# Altium PCB NumatoShieldAutoRouted.PcbDoc (part 1 of 2)
Units mm, origin at the board's own origin, x right, y up, seen from the top; angles counter-clockwise.
Board outline 127 x 127 mm, 4 copper layers (Top Layer, Mid-Layer 1, Mid-Layer 2, Bottom Layer); 8 components, 163 nets, 352 pads, 0 vias.
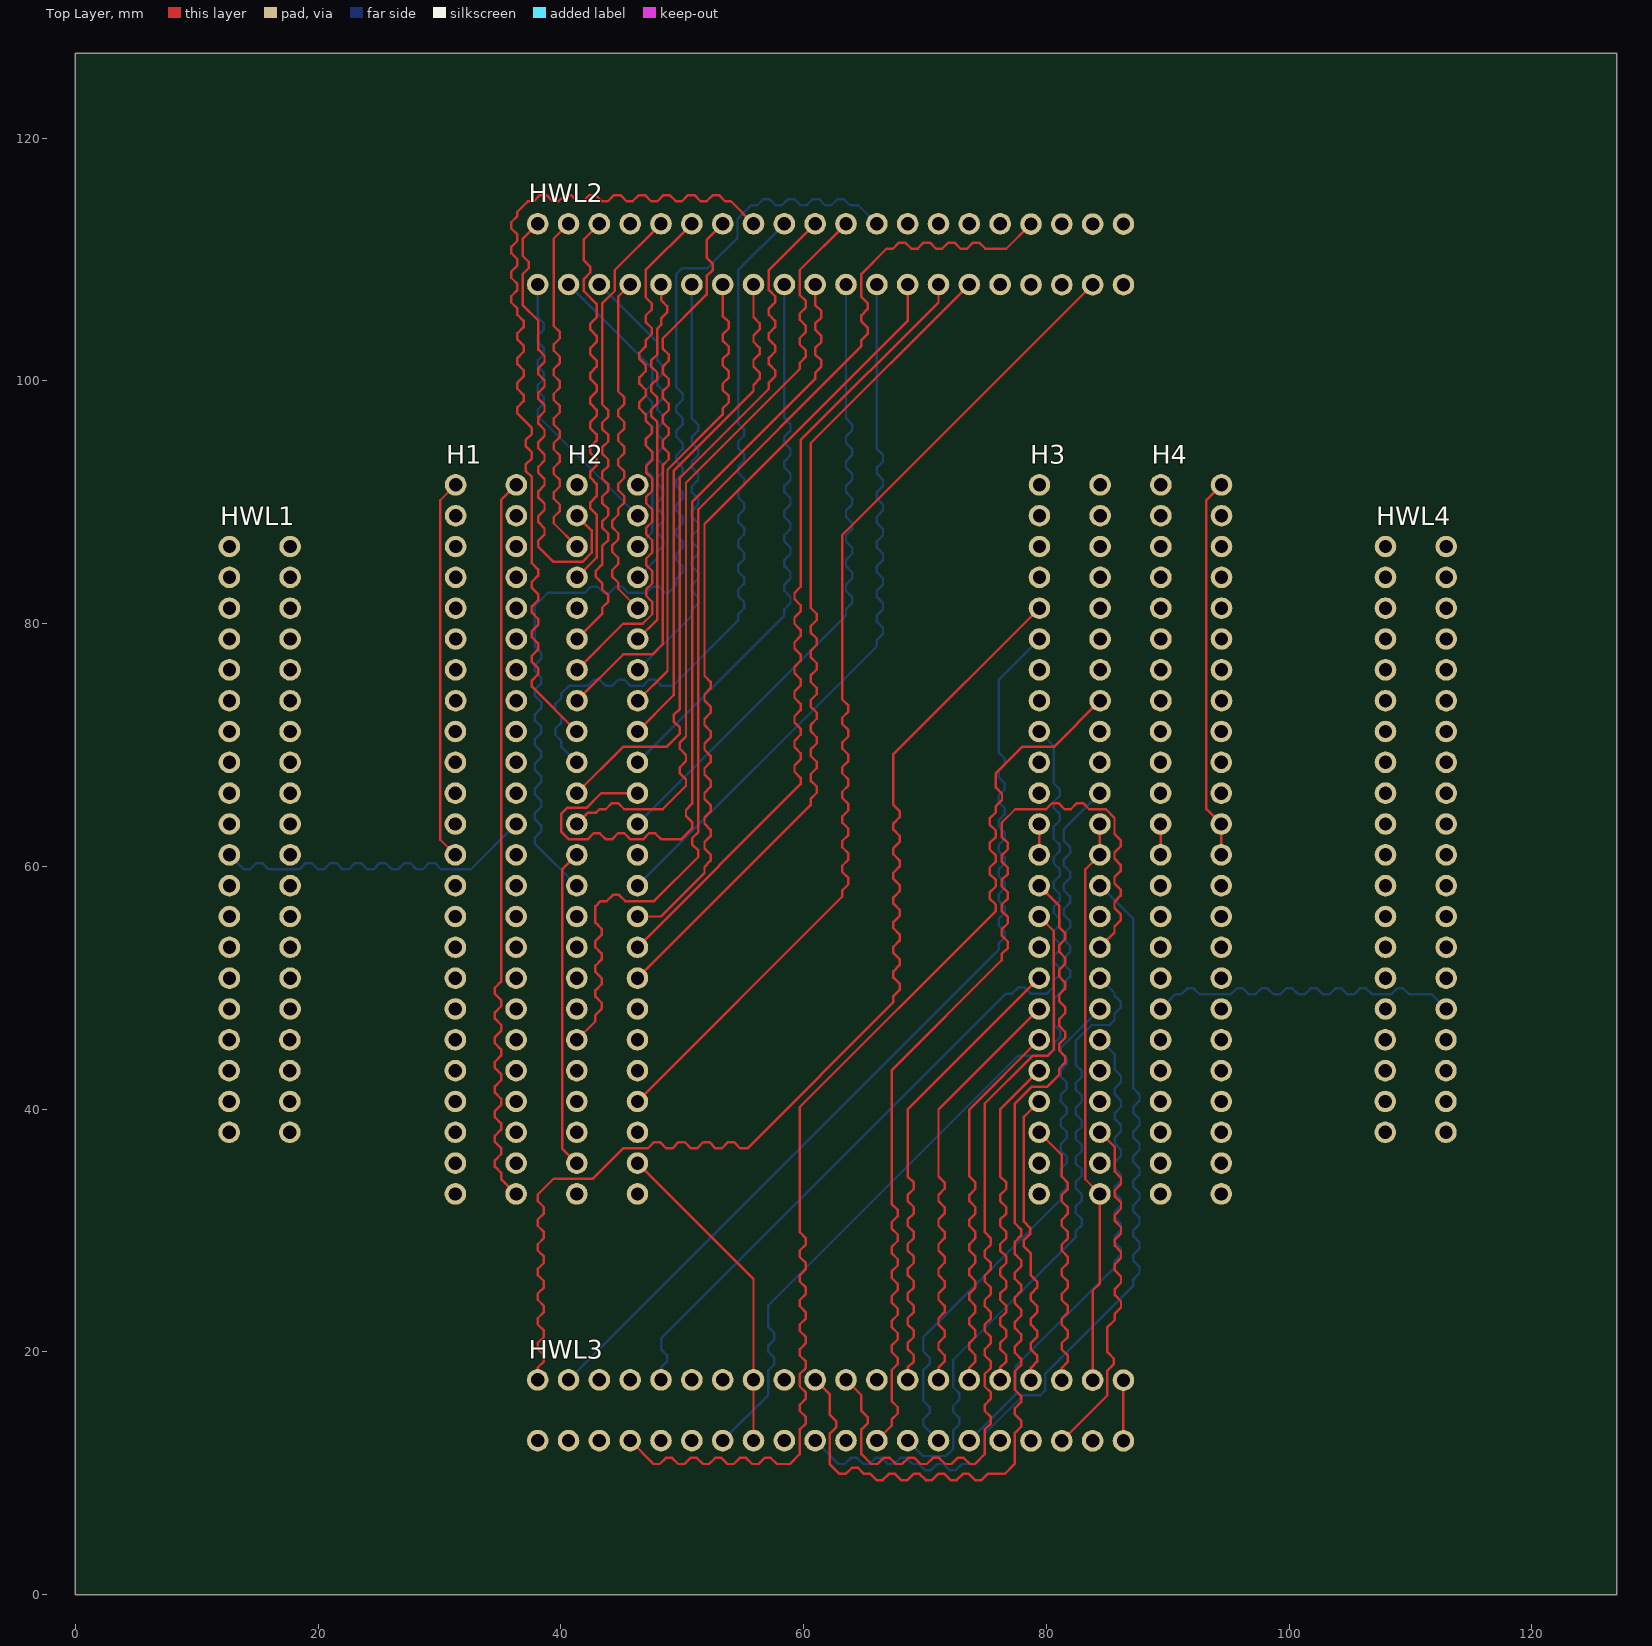
[diagram p0: Top Layer view]
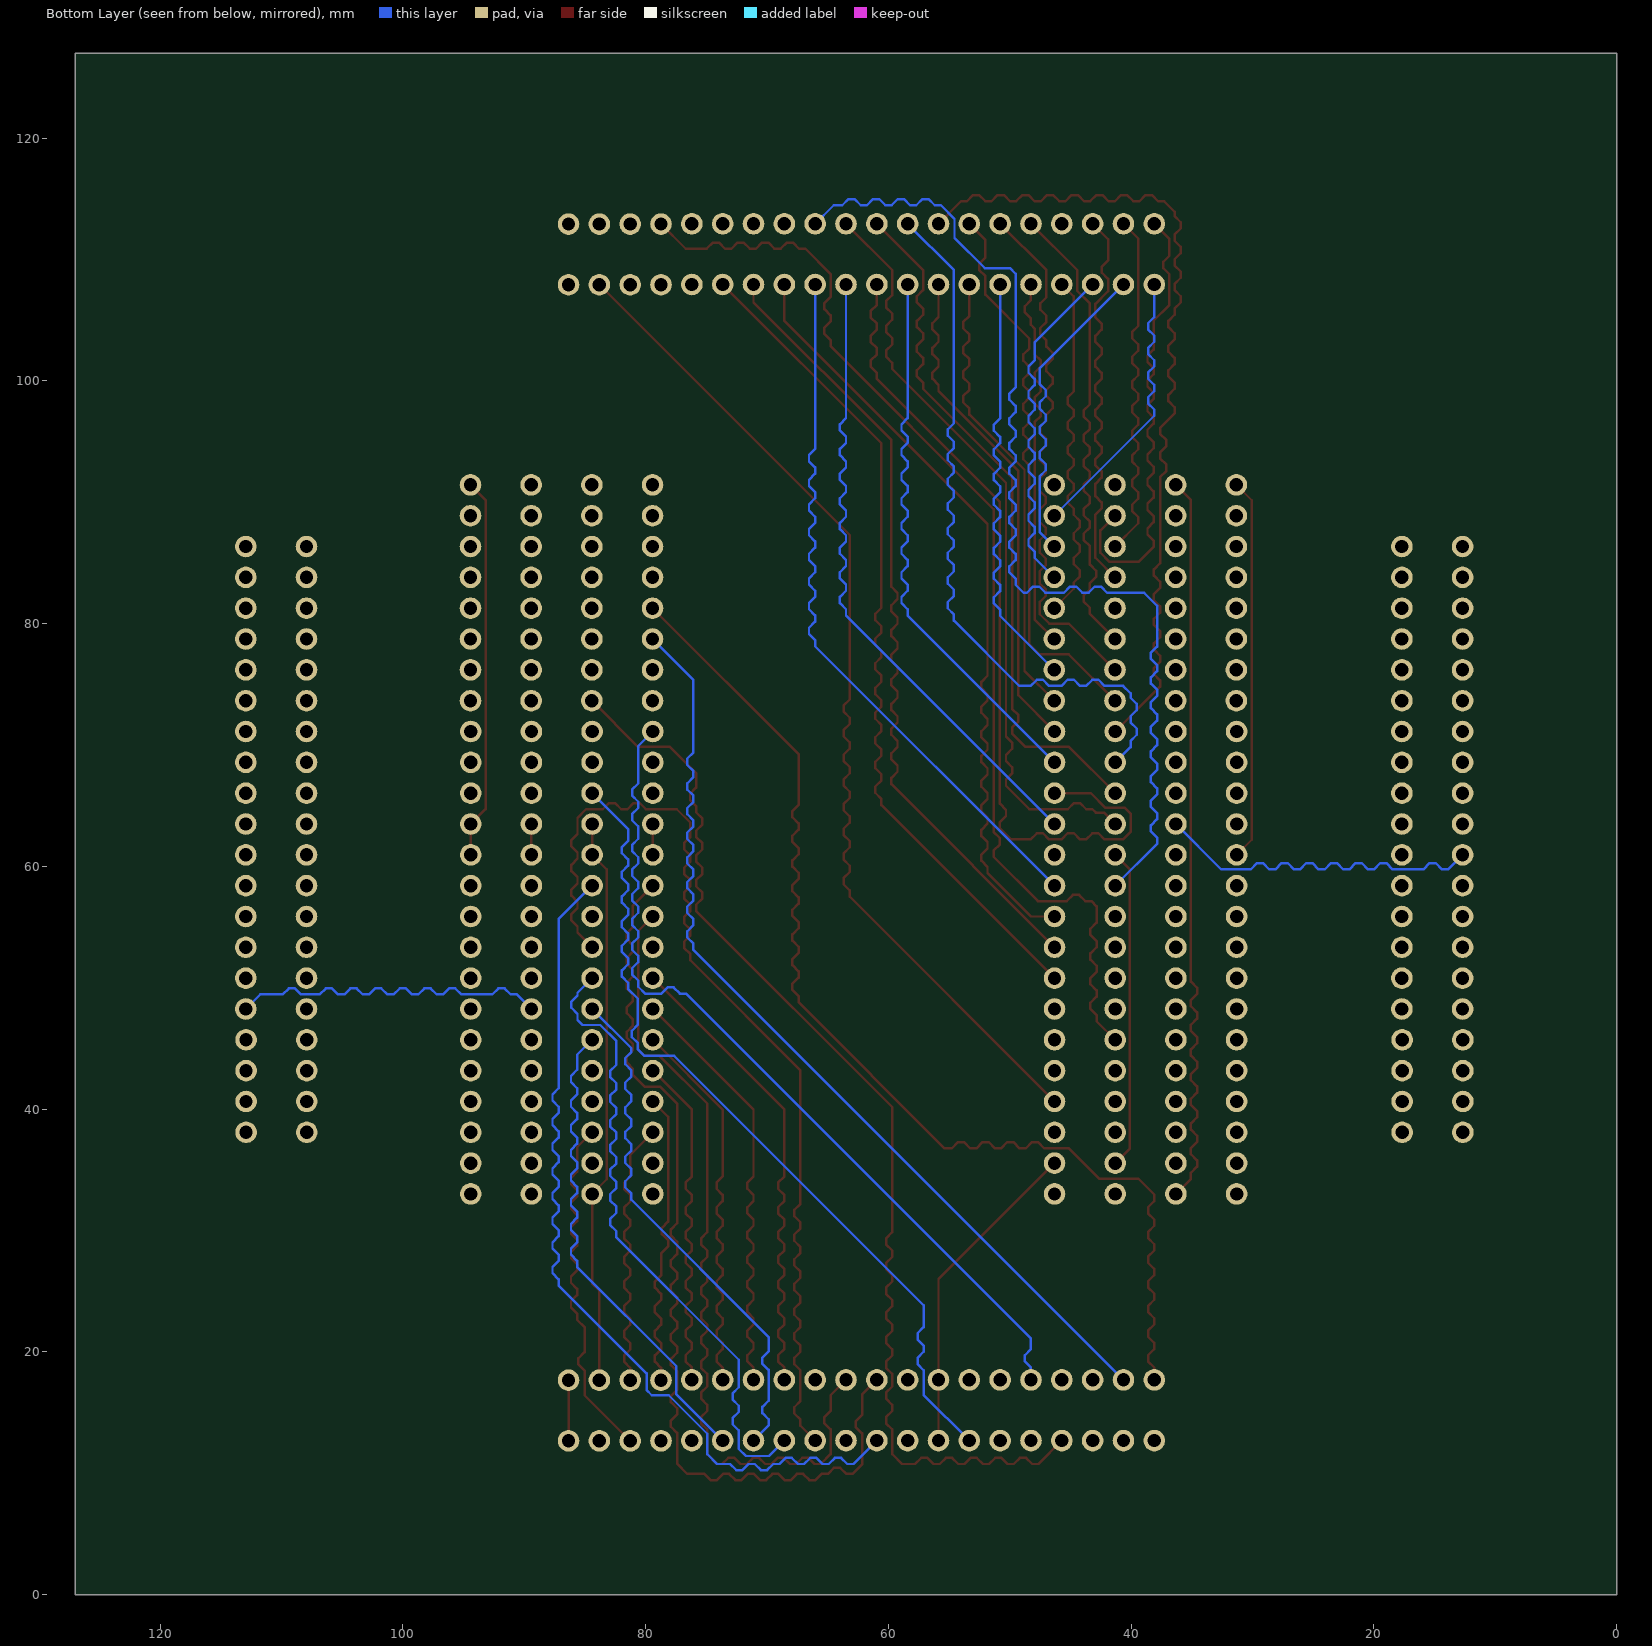
[diagram p1: Bottom Layer view, seen from below]
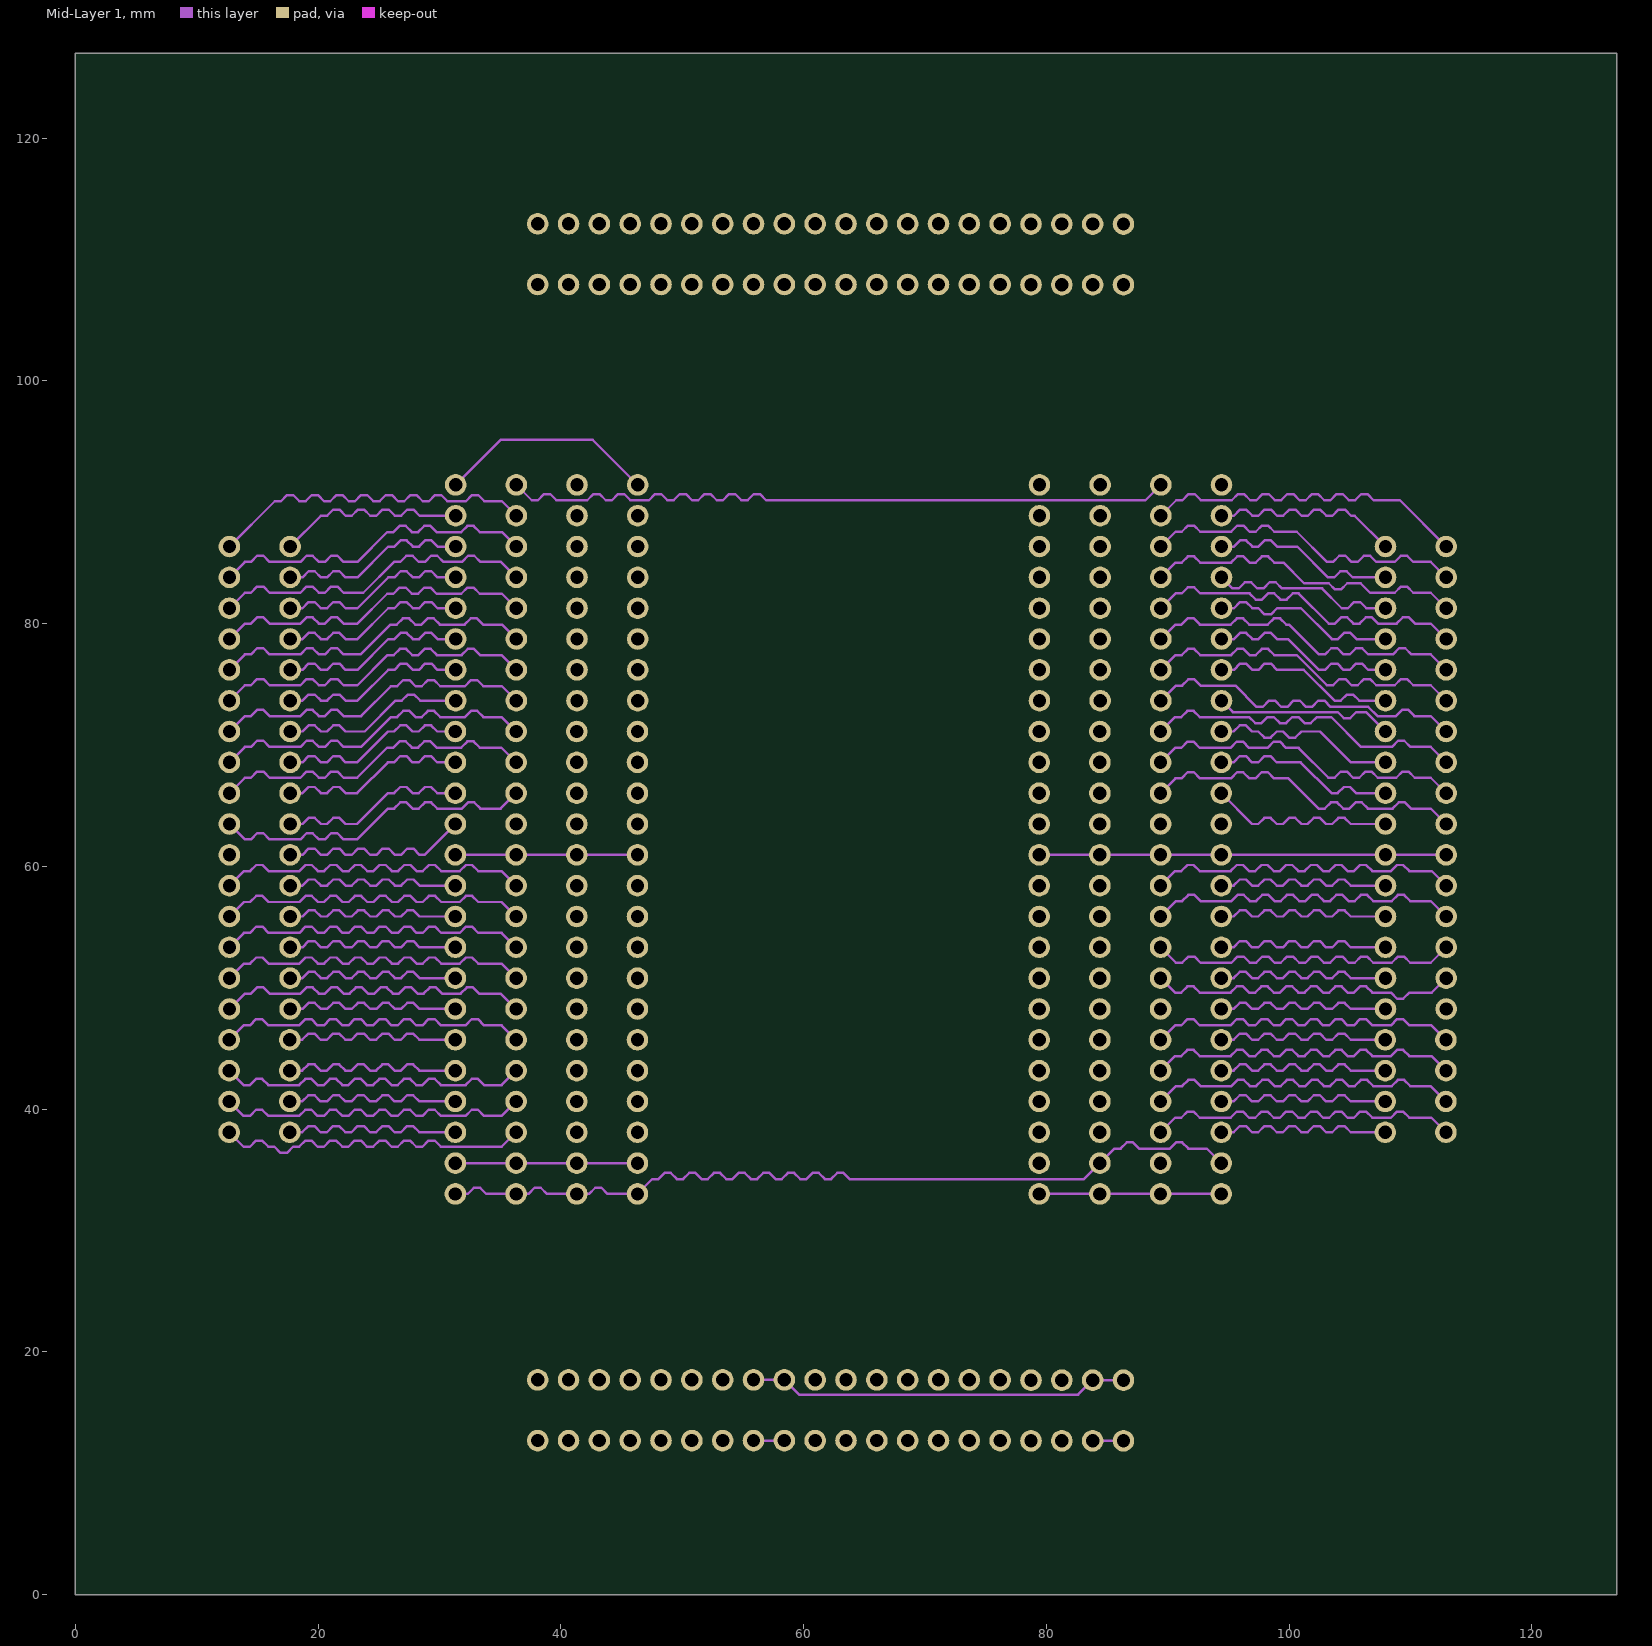
[diagram p2: Mid-Layer 1]
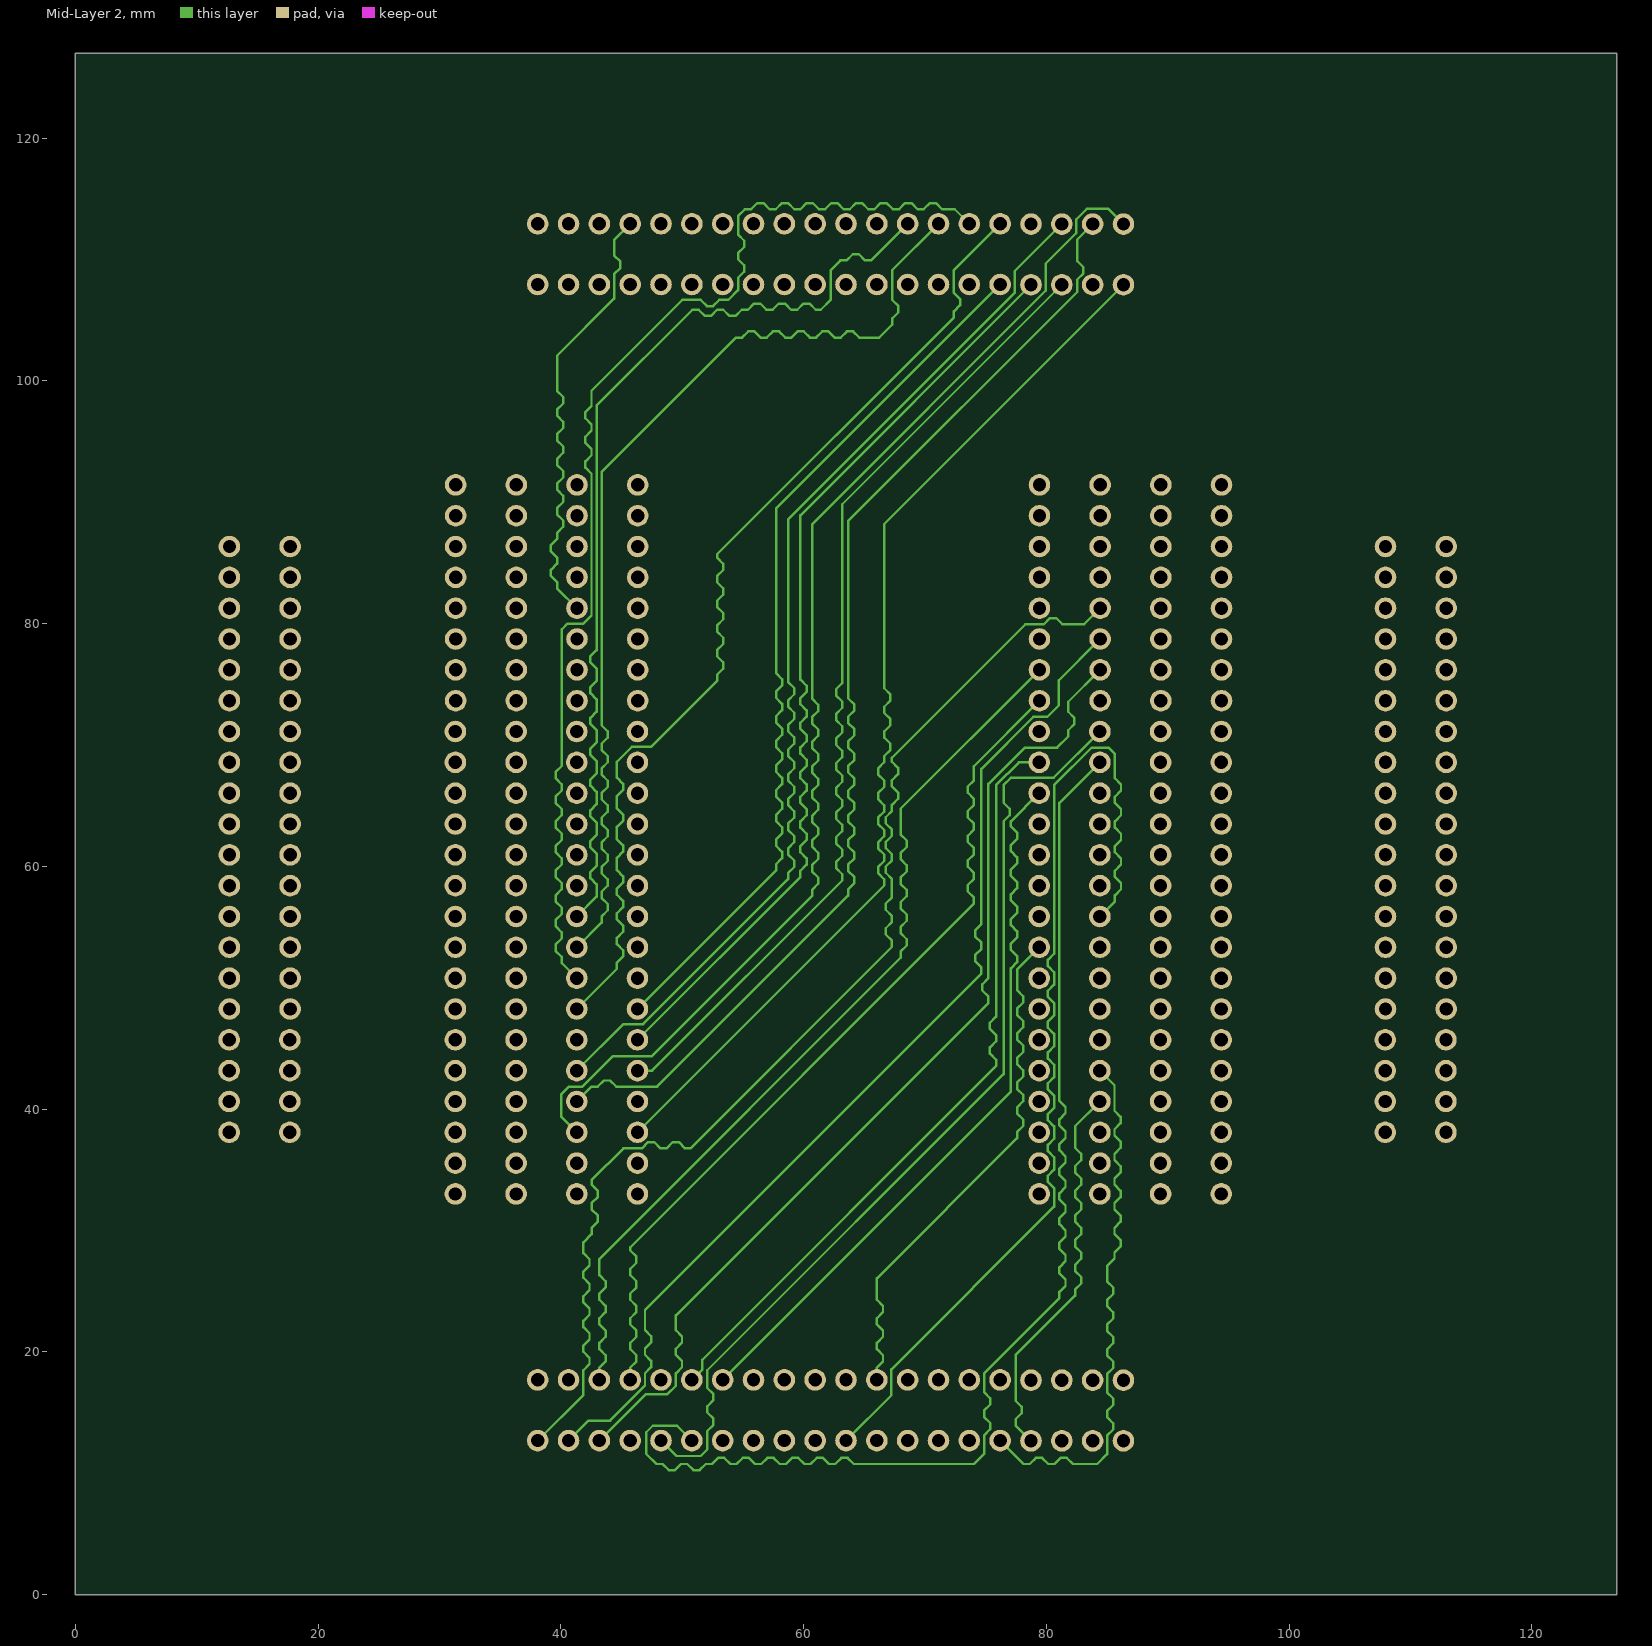
[diagram p3: Mid-Layer 2]

## Layer stack, top to bottom
Top Solder: solder mask 0.0102, Solder Resist, Dk 3.5
Top Layer: signal copper 0.0356
Dielectric 1: dielectric 0.32, FR-4, Dk 4.8
Mid-Layer 1: signal copper 0.0356
Dielectric2: dielectric 0.32, FR-4, Dk 4.8
Mid-Layer 2: signal copper 0.0356
Dielectric3: dielectric 0.32, FR-4, Dk 4.8
Bottom Layer: signal copper 0.0356
Bottom Solder: solder mask 0.0102, Solder Resist, Dk 3.5

## Board outline
0,0 127,0 127,127 0,127

## Design rules (kind name [scope] priority, off if disabled: settings)
Clearance [All] p1: gap=0.203
MatchedLengths [All] p1: tolerance=25.4 checknetsindiffpair=TRUE checkdiffpairvsdiffpair=TRUE checkothers=TRUE
PolygonConnect [All] p1: connectstyle=Relief reliefconductorwidth=0.254 reliefentries=4 polygonreliefangle="90 Angle" airgapwidth=0.254
RoutingVias [All] p1: holewidth=0.635 width=1.016 viastyle="Through Hole" minholewidth=0.711 minwidth=1.27 maxholewidth=0.711 maxwidth=1.27
SolderMaskExpansion [All] p1: expansion=0.102
Width [All] p1: maxlimit=0.203 minlimit=0.203 preferedwidth=0.203
29 further rules are at their usual default settings.

## Components (designator, comment, footprint, x,y, rotation, side; value= is the part's Value field where it differs from the comment)
H1 "HEADER2X48" H_FP 36.317,33.02 r90 top
H2 "HEADER2X48" H_FP 46.317,33.02 r90 top
H3 "HEADER2X48" H_FP 84.417,33.02 r90 top
H4 "HEADER2X48" H_FP 94.417,33.02 r90 top
HWL1 "71918-240LF" HWL_FP 12.7,86.36 r270 top
HWL2 "71918-240LF" HWL_FP 38.1,107.95 r0 top
HWL3 "71918-240LF" HWL_FP 38.1,12.7 r0 top
HWL4 "71918-240LF" HWL_FP 107.95,86.36 r270 top

## Footprints (in the part's own frame and the unit in brackets; to place one, negate y for a bottom-side part, rotate by r counter-clockwise, add the part's x,y. Pads: shape width x height; smd on the part's side, far side on the other; paste and mask are expansions set on the pad)
H_FP [mil]
  round 70 hole 43.31: 1(0,0) 2(0,196.85) 3(100,0) 4(100,196.85) 5(200,0) 6(200,196.85) 7(300,0) 8(300,196.85) 9(400,0) 10(400,196.85) 11(500,0) 12(500,196.85) 13(600,0) 14(600,196.85) 15(700,0) 16(700,196.85) 17(800,0) 18(800,196.85) 19(900,0) 20(900,196.85) 21(1000,0) 22(1000,196.85) 23(1100,0) 24(1100,196.85) 25(1200,0) 26(1200,196.85) 27(1300,0) 28(1300,196.85) 29(1400,0) 30(1400,196.85) 31(1500,0) 32(1500,196.85) 33(1600,-0.84) 34(1600,196.01) 35(1700,-0.84) 36(1700,196.01) 37(1800,-0.84) 38(1800,196.01) 39(1900,-0.84) 40(1900,196.01) 41(2000,-0.84) 42(2000,196.01) 43(2100,-0.84) 44(2100,196.01) 45(2200,-0.84) 46(2200,196.01) 47(2300,-0.84) 48(2300,196.01)
HWL_FP [mil]
  round 70 hole 43.31: 0(0,0) 1(100,0) 2(200,0) 3(300,0) 4(400,0) 5(500,0) 6(600,0) 7(700,0) 8(800,0) 9(900,0) 10(1000,0) 11(1100,0) 12(1200,0) 13(1300,0) 14(1400,0) 15(1500,0) 16(1600,-0.83) 17(1700,-0.83) 18(1800,-0.83) 19(1900,-0.83) 20(1900,196.02) 21(1800,196.02) 22(1700,196.02) 23(1600,196.02) 24(1500,196.85) 25(1400,196.85) 26(1300,196.85) 27(1200,196.85) 28(1100,196.85) 29(1000,196.85) 30(900,196.85) 31(800,196.85) 32(700,196.85) 33(600,196.85) 34(500,196.85) 35(400,196.85) 36(300,196.85) 37(200,196.85) 38(100,196.85) 39(0,196.85)

## Part data
HWL1 HWL2 HWL3 HWL4: "CONN HEADER 40POS DUAL VERT PCB"

## Nets (pads, with @x,y where several pads share a name; then routed paths per layer and width w, separated by ;. In a path a pad name is that pad's centre, name@x,y a point inside that pad or via, vN(x,y) a via of type N, cw(c..) or ccw(c..) an arc to the next point about the centre after c; other vN are vias at no path point)
3V3: H1.1 H1.2 H1.47 H2.1 H2.2 H3.3 H4.3 H4.48 | length 191
  Top Layer w0.203: H1.1@36.317,33.02 35.077,34.26 35.077,34.768 34.569,35.276 34.569,35.784 35.077,36.292 35.077,36.8 34.569,37.308 34.569,37.816 35.077,38.324 35.077,38.832 34.569,39.34 34.569,39.848 35.077,40.356 35.077,40.864 34.569,41.372 34.569,41.88 35.077,42.388 35.077,42.896 34.569,43.404 34.569,43.912 35.077,44.42 35.077,44.928 34.569,45.436 34.569,45.944 35.077,46.452 35.077,46.96 34.569,47.468 34.569,47.976 35.077,48.484 35.077,48.992 34.569,49.5 34.569,50.008 35.077,50.516 35.077,90.179 H1.47@36.339,91.44
  Mid-Layer 1 w0.203: H1.2@31.317,33.02 32.333,33.02 32.841,33.528 33.349,33.528 33.857,33.02 H1.1@36.317,33.02 37.333,33.02 37.841,33.528 38.349,33.528 38.857,33.02 H2.2@41.317,33.02 42.333,33.02 42.841,33.528 43.349,33.528 43.857,33.02 H2.1@46.317,33.02 47.537,34.239 48.045,34.239 48.553,34.747 49.061,34.747 49.569,34.239 50.077,34.239 50.585,34.747 51.093,34.747 51.601,34.239 52.109,34.239 52.617,34.747 53.125,34.747 53.633,34.239 54.141,34.239 54.649,34.747 55.157,34.747 55.665,34.239 56.173,34.239 56.681,34.747 57.189,34.747 57.697,34.239 58.205,34.239 58.713,34.747 59.221,34.747 59.729,34.239 60.237,34.239 60.745,34.747 61.253,34.747 61.761,34.239 62.269,34.239 62.777,34.747 63.285,34.747 63.793,34.239 83.097,34.239 H3.3@84.417,35.56 85.611,36.754 86.119,36.754 86.627,37.262 87.135,37.262 87.643,36.754 90.183,36.754 90.691,37.262 91.199,37.262 91.707,36.754 93.224,36.754 H4.3@94.417,35.56 ; H1.47@36.339,91.44 37.609,90.17 38.117,90.17 38.625,90.678 39.133,90.678 39.641,90.17 42.181,90.17 42.689,90.678 43.197,90.678 43.705,90.17 44.213,90.17 44.721,90.678 45.229,90.678 45.737,90.17 47.261,90.17 47.769,90.678 48.277,90.678 48.785,90.17 49.293,90.17 49.801,90.678 50.309,90.678 50.817,90.17 51.325,90.17 51.833,90.678 52.341,90.678 52.849,90.17 53.357,90.17 53.865,90.678 54.373,90.678 54.881,90.17 55.389,90.17 55.897,90.678 56.405,90.678 56.913,90.17 88.169,90.17 H4.48@89.439,91.44
A2: H2.6 HWL2.20 | length 104
  Mid-Layer 2 w0.203: H2.6@41.317,38.1 40.056,39.362 40.056,41.25 40.64,41.834 41.758,41.834 44.298,44.374 47.511,44.374 60.706,57.569 60.706,58.077 61.214,58.585 61.214,59.093 60.706,59.601 60.706,60.109 61.214,60.617 61.214,61.125 60.706,61.633 60.706,62.141 61.214,62.649 61.214,63.157 60.706,63.665 60.706,64.173 61.214,64.681 61.214,65.189 60.706,65.697 60.706,66.205 61.214,66.713 61.214,67.221 60.706,67.729 60.706,68.237 61.214,68.745 61.214,69.253 60.706,69.761 60.706,70.269 61.214,70.777 61.214,71.285 60.706,71.793 60.706,72.301 61.214,72.809 61.214,73.317 60.706,73.825 60.706,88.189 79.959,107.442 79.959,109.677 82.474,112.192 82.474,113.309 83.337,114.173 85.116,114.173 HWL2.20@86.36,112.929
A3: H1.6 HWL1.20 | length 15.7
  Mid-Layer 1 w0.203: HWL1.20@17.679,38.1 18.695,38.1 19.203,38.608 19.711,38.608 20.219,38.1 20.727,38.1 21.235,38.608 21.743,38.608 22.251,38.1 22.759,38.1 23.267,38.608 23.775,38.608 24.283,38.1 24.791,38.1 25.299,38.608 25.807,38.608 26.315,38.1 26.823,38.1 27.331,38.608 27.839,38.608 28.347,38.1 H1.6@31.317,38.1
A4: H2.8 HWL2.21 | length 97.3
  Mid-Layer 2 w0.203: H2.8@41.317,40.64 42.537,41.859 43.045,41.859 43.553,42.367 44.061,42.367 44.569,41.859 47.93,41.859 63.678,57.607 63.678,58.115 64.186,58.623 64.186,59.131 63.678,59.639 63.678,60.147 64.186,60.655 64.186,61.163 63.678,61.671 63.678,62.179 64.186,62.687 64.186,63.195 63.678,63.703 63.678,64.211 64.186,64.719 64.186,65.227 63.678,65.735 63.678,66.243 64.186,66.751 64.186,67.259 63.678,67.767 63.678,68.275 64.186,68.783 64.186,69.291 63.678,69.799 63.678,70.307 64.186,70.815 64.186,71.323 63.678,71.831 63.678,72.339 64.186,72.847 64.186,73.355 63.678,73.863 63.678,88.468 82.55,107.34 82.55,108.356 83.058,108.864 83.058,109.372 82.55,109.88 82.55,111.659 HWL2.21@83.82,112.929
A5: H1.8 HWL1.21 | length 15.7
  Mid-Layer 1 w0.203: HWL1.21@17.679,40.64 18.695,40.64 19.203,41.148 19.711,41.148 20.219,40.64 20.727,40.64 21.235,41.148 21.743,41.148 22.251,40.64 22.759,40.64 23.267,41.148 23.775,41.148 24.283,40.64 24.791,40.64 25.299,41.148 25.807,41.148 26.315,40.64 26.823,40.64 27.331,41.148 27.839,41.148 28.347,40.64 H1.8@31.317,40.64
A6: H1.10 HWL1.22 | length 15.7
  Mid-Layer 1 w0.203: HWL1.22@17.679,43.18 18.695,43.18 19.203,43.688 19.711,43.688 20.219,43.18 20.727,43.18 21.235,43.688 21.743,43.688 22.251,43.18 22.759,43.18 23.267,43.688 23.775,43.688 24.283,43.18 24.791,43.18 25.299,43.688 25.807,43.688 26.315,43.18 26.823,43.18 27.331,43.688 27.839,43.688 28.347,43.18 H1.10@31.317,43.18
A7: H2.12 HWL2.23 | length 96.1
  Top Layer w0.203: H2.12@41.317,45.72 42.85,47.252 42.85,47.76 43.358,48.268 43.358,48.776 42.85,49.284 42.85,49.792 43.358,50.3 43.358,50.808 42.85,51.316 42.85,51.824 43.358,52.332 43.358,52.84 42.85,53.348 42.85,53.856 43.358,54.364 43.358,54.872 42.85,55.38 42.85,56.718 43.282,57.15 43.79,57.15 44.298,57.658 44.806,57.658 45.314,57.15 47.684,57.15 51.333,60.8 51.333,61.308 50.825,61.816 50.825,62.324 51.333,62.832 51.333,89.433 64.77,102.87 64.77,103.378 65.278,103.886 65.278,104.394 64.77,104.902 64.77,105.41 65.278,105.918 65.278,106.426 64.77,106.934 64.77,108.814 66.853,110.896 67.361,110.896 67.869,111.404 68.377,111.404 68.885,110.896 69.393,110.896 69.901,111.404 70.409,111.404 70.917,110.896 71.425,110.896 71.933,111.404 72.441,111.404 72.949,110.896 73.457,110.896 73.965,111.404 74.473,111.404 74.981,110.896 76.708,110.896 HWL2.23@78.74,112.929
A8: H2.14 HWL2.24 | length 85.5
  Mid-Layer 2 w0.203: H2.14@41.317,48.26 44.628,51.57 44.628,52.078 45.136,52.586 45.136,53.094 44.628,53.602 44.628,54.11 45.136,54.618 45.136,55.126 44.628,55.634 44.628,56.142 45.136,56.65 45.136,57.158 44.628,57.666 44.628,58.174 45.136,58.682 45.136,59.19 44.628,59.698 44.628,60.714 45.136,61.222 45.136,61.73 44.628,62.238 44.628,63.254 45.136,63.762 45.136,64.27 44.628,64.778 44.628,65.794 45.136,66.302 45.136,66.81 44.628,67.318 44.628,68.631 45.847,69.85 47.447,69.85 52.883,75.286 52.883,75.794 53.391,76.302 53.391,76.81 52.883,77.318 52.883,77.826 53.391,78.334 53.391,78.842 52.883,79.35 52.883,79.858 53.391,80.366 53.391,80.874 52.883,81.382 52.883,81.89 53.391,82.398 53.391,82.906 52.883,83.414 52.883,83.922 53.391,84.43 53.391,84.938 52.883,85.446 52.883,85.725 72.39,105.232 72.39,105.74 72.898,106.248 72.898,106.756 72.39,107.264 72.39,109.14 HWL2.24@76.2,112.95
A9: H2.18 HWL2.26 | length 84.8
  Mid-Layer 2 w0.203: H2.18@41.317,53.34 43.358,55.38 43.358,55.888 43.866,56.396 43.866,56.904 43.358,57.412 43.358,57.92 43.866,58.428 43.866,58.936 43.358,59.444 43.358,59.952 43.866,60.46 43.866,60.968 43.358,61.476 43.358,61.984 43.866,62.492 43.866,63 43.358,63.508 43.358,64.016 43.866,64.524 43.866,65.032 43.358,65.54 43.358,66.048 43.866,66.556 43.866,67.064 43.358,67.572 43.358,68.08 43.866,68.588 43.866,69.096 43.358,69.604 43.358,70.112 43.866,70.62 43.866,71.128 43.358,71.636 43.358,92.507 54.432,103.581 54.94,103.581 55.448,104.089 55.956,104.089 56.464,103.581 56.972,103.581 57.48,104.089 57.988,104.089 58.496,103.581 59.004,103.581 59.512,104.089 60.02,104.089 60.528,103.581 61.036,103.581 61.544,104.089 62.052,104.089 62.56,103.581 63.068,103.581 63.576,104.089 64.084,104.089 64.592,103.581 66.243,103.581 67.31,104.648 67.31,105.156 67.818,105.664 67.818,106.172 67.31,106.68 67.31,109.14 HWL2.26@71.12,112.95
A10: H1.20 HWL1.27 | length 15.7
  Mid-Layer 1 w0.203: HWL1.27@17.7,55.88 18.716,55.88 19.224,56.388 19.732,56.388 20.24,55.88 20.748,55.88 21.256,56.388 21.764,56.388 22.272,55.88 22.78,55.88 23.288,56.388 23.796,56.388 24.304,55.88 24.812,55.88 25.32,56.388 25.828,56.388 26.336,55.88 26.844,55.88 27.352,56.388 27.86,56.388 28.368,55.88 H1.20@31.317,55.88
A11: H2.22 HWL2.28 | length 92.6
  Bottom Layer w0.203: H2.22@41.317,58.42 37.871,61.866 37.871,62.374 38.379,62.882 38.379,63.39 37.871,63.898 37.871,64.406 38.379,64.914 38.379,65.422 37.871,65.93 37.871,66.438 38.379,66.946 38.379,67.454 37.871,67.962 37.871,68.47 38.379,68.978 38.379,69.486 37.871,69.994 37.871,70.502 38.379,71.01 38.379,71.518 37.871,72.026 37.871,72.534 38.379,73.042 38.379,73.55 37.871,74.058 37.871,74.566 38.379,75.074 38.379,75.582 37.871,76.09 37.871,76.598 38.379,77.106 38.379,77.614 37.871,78.122 37.871,81.483 38.938,82.55 41.986,82.55 42.494,83.058 43.002,83.058 43.51,82.55 44.018,82.55 44.526,83.058 45.034,83.058 45.542,82.55 47.066,82.55 47.574,83.058 48.082,83.058 48.59,82.55 48.87,82.55 49.53,83.21 49.53,83.718 50.038,84.226 50.038,84.734 49.53,85.242 49.53,85.75 50.038,86.258 50.038,86.766 49.53,87.274 49.53,87.782 50.038,88.29 50.038,88.798 49.53,89.306 49.53,89.814 50.038,90.322 50.038,90.83 49.53,91.338 49.53,91.846 50.038,92.354 50.038,92.862 49.53,93.37 49.53,93.878 50.038,94.386 50.038,94.894 49.53,95.402 49.53,95.91 50.038,96.418 50.038,96.926 49.53,97.434 49.53,97.942 50.038,98.45 50.038,98.958 49.53,99.466 49.53,108.839 49.987,109.296 52.07,109.296 54.559,111.785 54.559,113.36 55.677,114.478 56.185,114.478 56.693,114.986 57.201,114.986 57.709,114.478 58.217,114.478 58.725,114.986 59.233,114.986 59.741,114.478 60.249,114.478 60.757,114.986 61.265,114.986 61.773,114.478 62.281,114.478 62.789,114.986 63.297,114.986 63.805,114.478 64.512,114.478 HWL2.28@66.04,112.95
A12: H2.28 HWL2.30 | length 59.3
  Top Layer w0.203: H2.28@41.317,66.04 45.127,69.85 48.717,69.85 49.809,70.942 49.809,71.45 49.301,71.958 49.301,72.466 49.809,72.974 49.809,92.024 57.15,99.365 57.15,99.873 57.658,100.381 57.658,100.889 57.15,101.397 57.15,101.905 57.658,102.413 57.658,102.921 57.15,103.429 57.15,103.937 57.658,104.445 57.658,104.953 57.15,105.461 57.15,105.969 57.658,106.477 57.658,106.985 57.15,107.493 57.15,109.14 HWL2.30@60.96,112.95
A13: H1.30 HWL1.31 | length 16.4
  Mid-Layer 1 w0.203: HWL1.31@17.7,66.04 18.716,66.04 19.224,66.548 19.732,66.548 20.24,66.04 20.748,66.04 21.256,66.548 21.764,66.548 22.272,66.04 23.216,66.04 25.756,68.58 26.264,68.58 26.772,69.088 27.28,69.088 27.788,68.58 28.296,68.58 28.804,69.088 29.312,69.088 29.82,68.58 H1.30@31.317,68.58
A14: H1.32 HWL1.32 | length 16.4
  Mid-Layer 1 w0.203: HWL1.32@17.7,68.58 18.716,68.58 19.224,69.088 19.732,69.088 20.24,68.58 20.748,68.58 21.256,69.088 21.764,69.088 22.272,68.58 23.216,68.58 25.756,71.12 26.264,71.12 26.772,71.628 27.28,71.628 27.788,71.12 28.296,71.12 28.804,71.628 29.312,71.628 29.82,71.12 H1.32@31.317,71.12
A15: H1.34 HWL1.33 | length 16
  Mid-Layer 1 w0.203: HWL1.33@17.7,71.12 18.716,71.12 19.224,71.628 19.732,71.628 20.24,71.12 20.748,71.12 21.256,71.628 21.764,71.628 22.272,71.12 23.851,71.12 26.391,73.66 26.899,73.66 27.407,74.168 27.915,74.168 28.423,73.66 H1.34@31.339,73.66
A16: H2.36 HWL2.34 | length 46.7
  Top Layer w0.203: H2.36@41.339,76.2 45.149,80.01 46.757,80.01 47.532,80.785 47.532,81.801 47.024,82.309 47.024,82.817 47.532,83.325 47.532,84.341 47.024,84.849 47.024,85.357 47.532,85.865 47.532,86.881 47.024,87.389 47.024,87.897 47.532,88.405 47.532,89.421 47.024,89.929 47.024,90.437 47.532,90.945 47.532,91.961 47.024,92.469 47.024,92.977 47.532,93.485 47.532,94.165 46.99,94.708 46.99,95.216 47.498,95.724 47.498,96.232 46.99,96.74 46.99,97.248 46.482,97.756 46.482,98.264 46.99,98.772 46.99,99.28 46.482,99.788 46.482,100.296 46.99,100.804 46.99,101.312 46.482,101.82 46.482,102.328 46.99,102.836 46.99,103.344 47.498,103.852 47.498,104.36 46.99,104.868 46.99,105.376 47.498,105.884 47.498,106.392 46.99,106.9 46.99,109.14 HWL2.34@50.8,112.95
ACBUS0: H3.48
ACBUS1: H3.47
ACBUS2: H3.46
ACBUS3: H3.45
ACBUS4: H3.44
ACBUS5: H3.43
ACBUS6: H3.42
ACBUS7: H3.41
B2: H2.5 HWL2.19 | length 89.8
  Mid-Layer 2 w0.203: H2.5@46.317,38.1 66.65,58.432 66.65,58.94 66.142,59.448 66.142,59.956 66.65,60.464 66.65,60.972 66.142,61.48 66.142,61.988 66.65,62.496 66.65,63.004 66.142,63.512 66.142,64.02 66.65,64.528 66.65,65.036 66.142,65.544 66.142,66.052 66.65,66.56 66.65,67.068 66.142,67.576 66.142,68.084 66.65,68.592 66.65,69.1 67.158,69.608 67.158,70.116 66.65,70.624 66.65,71.132 67.158,71.64 67.158,72.148 66.65,72.656 66.65,73.164 67.158,73.672 67.158,74.18 66.65,74.688 66.65,88.218 HWL2.19@86.36,107.929
B3: H1.5 HWL1.19 | length 28
  Mid-Layer 1 w0.203: HWL1.19@12.679,38.1 13.873,36.906 14.381,36.906 14.889,37.414 15.397,37.414 15.905,36.906 16.413,36.906 16.921,36.398 17.429,36.398 17.937,36.906 18.445,36.906 18.953,37.414 19.461,37.414 19.969,36.906 20.477,36.906 20.985,37.414 21.493,37.414 22.001,36.906 22.509,36.906 23.017,37.414 23.525,37.414 24.033,36.906 24.541,36.906 25.049,37.414 25.557,37.414 26.065,36.906 26.573,36.906 27.081,37.414 27.589,37.414 28.097,36.906 28.605,36.906 29.113,37.414 29.621,37.414 30.129,36.906 35.124,36.906 H1.5@36.317,38.1
B4: H2.7 HWL2.18 | length 86.2
  Top Layer w0.203: H2.7@46.317,40.64 63.195,57.518 63.195,58.026 63.703,58.534 63.703,59.042 63.195,59.55 63.195,60.058 63.703,60.566 63.703,61.074 63.195,61.582 63.195,62.09 63.703,62.598 63.703,63.106 63.195,63.614 63.195,64.122 63.703,64.63 63.703,65.138 63.195,65.646 63.195,66.154 63.703,66.662 63.703,67.17 63.195,67.678 63.195,68.186 63.703,68.694 63.703,69.202 63.195,69.71 63.195,70.218 63.703,70.726 63.703,71.234 63.195,71.742 63.195,72.25 63.703,72.758 63.703,73.266 63.195,73.774 63.195,87.304 HWL2.18@83.82,107.929
B6: H1.9 HWL1.17 | length 28
  Mid-Layer 1 w0.203: HWL1.17@12.679,43.18 13.873,41.986 14.381,41.986 14.889,42.494 15.397,42.494 15.905,41.986 18.445,41.986 18.953,42.494 19.461,42.494 19.969,41.986 20.477,41.986 20.985,42.494 21.493,42.494 22.001,41.986 22.509,41.986 23.017,42.494 23.525,42.494 24.033,41.986 24.541,41.986 25.049,42.494 25.557,42.494 26.065,41.986 26.573,41.986 27.081,42.494 27.589,42.494 28.097,41.986 28.605,41.986 29.113,42.494 29.621,42.494 30.129,41.986 32.161,41.986 32.669,42.494 33.177,42.494 33.685,41.986 35.124,41.986 H1.9@36.317,43.18
B8: H2.13 HWL2.15 | length 75.4
  Mid-Layer 2 w0.203: H2.13@46.317,48.26 57.734,59.677 57.734,60.185 58.242,60.693 58.242,61.201 57.734,61.709 57.734,62.217 58.242,62.725 58.242,63.233 57.734,63.741 57.734,64.249 58.242,64.757 58.242,65.265 57.734,65.773 57.734,66.281 58.242,66.789 58.242,67.297 57.734,67.805 57.734,68.313 58.242,68.821 58.242,69.329 57.734,69.837 57.734,70.345 58.242,70.853 58.242,71.361 57.734,71.869 57.734,72.377 58.242,72.885 58.242,73.393 57.734,73.901 57.734,74.409 58.242,74.917 58.242,75.425 57.734,75.933 57.734,89.484 HWL2.15@76.2,107.95
B9: H2.17 HWL2.13 | length 68.3
  Top Layer w0.203: H2.17@46.317,53.34 59.766,66.789 59.766,67.297 59.258,67.805 59.258,68.313 59.766,68.821 59.766,69.329 59.258,69.837 59.258,70.345 59.766,70.853 59.766,71.361 59.258,71.869 59.258,72.377 59.766,72.885 59.766,73.393 59.258,73.901 59.258,74.409 59.766,74.917 59.766,75.425 59.258,75.933 59.258,76.441 59.766,76.949 59.766,77.457 59.258,77.965 59.258,78.473 59.766,78.981 59.766,79.489 59.258,79.997 59.258,80.505 59.766,81.013 59.766,81.521 59.258,82.029 59.258,82.537 59.766,83.045 59.766,95.123 71.12,106.477 HWL2.13@71.12,107.95
B11: H2.21 HWL2.11 | length 61.1
  Bottom Layer w0.203: H2.21@46.317,58.42 66.04,78.143 66.04,78.651 66.548,79.159 66.548,79.667 66.04,80.175 66.04,80.683 66.548,81.191 66.548,81.699 66.04,82.207 66.04,82.715 66.548,83.223 66.548,83.731 66.04,84.239 66.04,84.747 66.548,85.255 66.548,85.763 66.04,86.271 66.04,86.779 66.548,87.287 66.548,87.795 66.04,88.303 66.04,88.811 66.548,89.319 66.548,89.827 66.04,90.335 66.04,90.843 66.548,91.351 66.548,91.859 66.04,92.367 66.04,92.875 66.548,93.383 66.548,93.891 66.04,94.399 HWL2.11@66.04,107.95
B12: H2.27 HWL2.9 | length 71.8
  Top Layer w0.203: H2.27@46.317,66.04 43.332,66.04 42.113,64.821 40.513,64.821 40.056,64.364 40.056,62.84 40.665,62.23 42.189,62.23 42.697,62.738 43.205,62.738 43.713,62.23 44.221,62.23 44.729,62.738 45.237,62.738 45.745,62.23 46.761,62.23 47.269,62.738 47.777,62.738 48.285,62.23 49.911,62.23 50.825,63.144 50.825,63.652 50.317,64.16 50.317,64.668 50.825,65.176 50.825,90.031 60.96,100.166 60.96,100.674 61.468,101.182 61.468,101.69 60.96,102.198 60.96,102.706 61.468,103.214 61.468,103.722 60.96,104.23 60.96,104.738 61.468,105.246 61.468,105.754 60.96,106.262 HWL2.9@60.96,107.95
B14: H1.31 HWL1.7 | length 28.2
  Mid-Layer 1 w0.203: HWL1.7@12.7,68.58 13.97,69.85 14.478,69.85 14.986,70.358 15.494,70.358 16.002,69.85 18.542,69.85 19.05,70.358 19.558,70.358 20.066,69.85 20.574,69.85 21.082,70.358 21.59,70.358 22.098,69.85 23.546,69.85 26.01,72.314 26.518,72.314 27.026,72.822 27.534,72.822 28.042,72.314 28.55,72.314 29.058,72.822 29.566,72.822 30.074,72.314 32.106,72.314 32.614,72.822 33.122,72.822 33.63,72.314 35.124,72.314 H1.31@36.317,71.12
B16: H2.35 HWL2.5 | length 37
  Bottom Layer w0.203: H2.35@46.339,76.2 50.8,80.661 50.8,81.169 51.308,81.677 51.308,82.185 50.8,82.693 50.8,83.201 51.308,83.709 51.308,84.217 50.8,84.725 50.8,85.233 51.308,85.741 51.308,86.249 50.8,86.757 50.8,87.265 51.308,87.773 51.308,88.281 50.8,88.789 50.8,89.297 51.308,89.805 51.308,90.313 50.8,90.821 50.8,91.329 51.308,91.837 51.308,92.345 50.8,92.853 50.8,93.361 51.308,93.869 51.308,94.377 50.8,94.885 50.8,95.393 51.308,95.901 51.308,96.409 50.8,96.917 HWL2.5@50.8,107.95
C5: H1.7 HWL1.18 | length 28
  Mid-Layer 1 w0.203: HWL1.18@12.679,40.64 13.873,39.446 14.381,39.446 14.889,39.954 15.397,39.954 15.905,39.446 18.445,39.446 18.953,39.954 19.461,39.954 19.969,39.446 20.477,39.446 20.985,39.954 21.493,39.954 22.001,39.446 22.509,39.446 23.017,39.954 23.525,39.954 24.033,39.446 24.541,39.446 25.049,39.954 25.557,39.954 26.065,39.446 26.573,39.446 27.081,39.954 27.589,39.954 28.097,39.446 28.605,39.446 29.113,39.954 29.621,39.954 30.129,39.446 32.161,39.446 32.669,39.954 33.177,39.954 33.685,39.446 35.124,39.446 H1.7@36.317,40.64
C6: H2.10 HWL2.22 | length 90.6
  Mid-Layer 2 w0.203: H2.10@41.317,43.18 45.153,47.015 46.787,47.015 58.725,58.953 58.725,59.461 59.233,59.969 59.233,60.477 58.725,60.985 58.725,61.493 59.233,62.001 59.233,62.509 58.725,63.017 58.725,63.525 59.233,64.033 59.233,64.541 58.725,65.049 58.725,65.557 59.233,66.065 59.233,66.573 58.725,67.081 58.725,67.589 59.233,68.097 59.233,68.605 58.725,69.113 58.725,69.621 59.233,70.129 59.233,70.637 58.725,71.145 58.725,71.653 59.233,72.161 59.233,72.669 58.725,73.177 58.725,73.685 59.233,74.193 59.233,74.701 58.725,75.209 58.725,88.595 77.394,107.264 77.394,109.043 HWL2.22@81.28,112.929
C7: H2.11 HWL2.16 | length 79
  Mid-Layer 2 w0.203: H2.11@46.317,45.72 59.741,59.143 59.741,59.651 60.249,60.159 60.249,60.667 59.741,61.175 59.741,61.683 60.249,62.191 60.249,62.699 59.741,63.207 59.741,63.715 60.249,64.223 60.249,64.731 59.741,65.239 59.741,65.747 60.249,66.255 60.249,66.763 59.741,67.271 59.741,67.779 60.249,68.287 60.249,68.795 59.741,69.303 59.741,69.811 60.249,70.319 60.249,70.827 59.741,71.335 59.741,71.843 60.249,72.351 60.249,72.859 59.741,73.367 59.741,73.875 60.249,74.383 60.249,74.891 59.741,75.399 59.741,88.93 HWL2.16@78.74,107.929
C8: H1.14 HWL1.24 | length 15.7
  Mid-Layer 1 w0.203: HWL1.24@17.7,48.26 18.716,48.26 19.224,48.768 19.732,48.768 20.24,48.26 20.748,48.26 21.256,48.768 21.764,48.768 22.272,48.26 22.78,48.26 23.288,48.768 23.796,48.768 24.304,48.26 24.812,48.26 25.32,48.768 25.828,48.768 26.336,48.26 26.844,48.26 27.352,48.768 27.86,48.768 28.368,48.26 H1.14@31.317,48.26
C9: H1.18 HWL1.26 | length 15.7
  Mid-Layer 1 w0.203: HWL1.26@17.7,53.34 18.716,53.34 19.224,53.848 19.732,53.848 20.24,53.34 20.748,53.34 21.256,53.848 21.764,53.848 22.272,53.34 22.78,53.34 23.288,53.848 23.796,53.848 24.304,53.34 24.812,53.34 25.32,53.848 25.828,53.848 26.336,53.34 26.844,53.34 27.352,53.848 27.86,53.848 28.368,53.34 H1.18@31.317,53.34
C10: H1.19 HWL1.12 | length 28
  Mid-Layer 1 w0.203: HWL1.12@12.7,55.88 13.894,57.074 14.402,57.074 14.91,57.582 15.418,57.582 15.926,57.074 18.466,57.074 18.974,57.582 19.482,57.582 19.99,57.074 20.498,57.074 21.006,57.582 21.514,57.582 22.022,57.074 22.53,57.074 23.038,57.582 23.546,57.582 24.054,57.074 24.562,57.074 25.07,57.582 25.578,57.582 26.086,57.074 26.594,57.074 27.102,57.582 27.61,57.582 28.118,57.074 28.626,57.074 29.134,57.582 29.642,57.582 30.15,57.074 31.674,57.074 32.182,57.582 32.69,57.582 33.198,57.074 35.124,57.074 H1.19@36.317,55.88
C11: H2.26 HWL2.29 | length 64.6
  Top Layer w0.203: H2.26@41.317,63.5 42.257,64.44 42.918,64.44 43.197,64.719 43.705,64.719 44.213,65.227 44.721,65.227 45.229,64.719 48.387,64.719 50.317,66.65 50.317,67.158 49.809,67.666 49.809,68.174 50.317,68.682 50.317,69.19 49.809,69.698 49.809,70.206 50.317,70.714 50.317,91.614 59.69,100.987 59.69,101.495 60.198,102.003 60.198,102.511 59.69,103.019 59.69,103.527 60.198,104.035 60.198,104.543 59.69,105.051 59.69,105.559 60.198,106.067 60.198,106.575 59.69,107.083 59.69,109.14 HWL2.29@63.5,112.95
C12: H1.28 HWL1.30 | length 16.4
  Mid-Layer 1 w0.203: HWL1.30@17.7,63.5 18.716,63.5 19.224,64.008 19.732,64.008 20.24,63.5 20.748,63.5 21.256,64.008 21.764,64.008 22.272,63.5 23.216,63.5 25.756,66.04 26.264,66.04 26.772,66.548 27.28,66.548 27.788,66.04 28.296,66.04 28.804,66.548 29.312,66.548 29.82,66.04 H1.28@31.317,66.04
C13: H1.29 HWL1.8 | length 28.2
  Mid-Layer 1 w0.203: HWL1.8@12.7,66.04 13.97,67.31 14.478,67.31 14.986,67.818 15.494,67.818 16.002,67.31 18.542,67.31 19.05,67.818 19.558,67.818 20.066,67.31 20.574,67.31 21.082,67.818 21.59,67.818 22.098,67.31 23.216,67.31 25.705,69.799 26.213,69.799 26.721,70.307 27.229,70.307 27.737,69.799 28.245,69.799 28.753,70.307 29.261,70.307 29.769,69.799 31.801,69.799 32.309,70.307 32.817,70.307 33.325,69.799 35.098,69.799 H1.29@36.317,68.58
C14: H2.34 HWL2.33 | length 48.2
  Top Layer w0.203: H2.34@41.339,73.66 45.149,77.47 47.549,77.47 48.387,78.308 48.387,93.04 48.895,93.548 48.895,94.056 48.387,94.564 48.387,95.072 48.895,95.58 48.895,96.088 48.387,96.596 48.387,97.104 48.895,97.612 48.895,98.12 48.387,98.628 48.387,99.136 48.895,99.644 48.895,100.152 48.387,100.66 48.387,101.168 48.895,101.676 48.895,102.184 48.387,102.692 48.387,103.48 52.019,107.112 52.019,108.636 52.527,109.144 52.527,109.652 52.019,110.16 52.019,111.629 HWL2.33@53.34,112.95
C15: H1.33 HWL1.6 | length 28.2
  Mid-Layer 1 w0.203: HWL1.6@12.7,71.12 13.97,72.39 14.478,72.39 14.986,72.898 15.494,72.898 16.002,72.39 18.542,72.39 19.05,72.898 19.558,72.898 20.066,72.39 20.574,72.39 21.082,72.898 21.59,72.898 22.098,72.39 23.546,72.39 26.01,74.854 26.518,74.854 27.026,75.362 27.534,75.362 28.042,74.854 28.55,74.854 29.058,75.362 29.566,75.362 30.074,74.854 32.106,74.854 32.614,75.362 33.122,75.362 33.63,74.854 35.145,74.854 H1.33@36.339,73.66
C17: H1.35 HWL1.5 | length 28.2
  Mid-Layer 1 w0.203: HWL1.5@12.7,73.66 13.97,74.93 14.478,74.93 14.986,75.438 15.494,75.438 16.002,74.93 18.542,74.93 19.05,75.438 19.558,75.438 20.066,74.93 20.574,74.93 21.082,75.438 21.59,75.438 22.098,74.93 23.241,74.93 25.73,77.419 26.238,77.419 26.746,77.927 27.254,77.927 27.762,77.419 28.27,77.419 28.778,77.927 29.286,77.927 29.794,77.419 31.826,77.419 32.334,77.927 32.842,77.927 33.35,77.419 35.119,77.419 H1.35@36.339,76.2
C18: H1.36 HWL1.34 | length 16.4
  Mid-Layer 1 w0.203: HWL1.34@17.7,73.66 18.716,73.66 19.224,74.168 19.732,74.168 20.24,73.66 20.748,73.66 21.256,74.168 21.764,74.168 22.272,73.66 23.241,73.66 25.781,76.2 26.289,76.2 26.797,76.708 27.305,76.708 27.813,76.2 28.321,76.2 28.829,76.708 29.337,76.708 29.845,76.2 H1.36@31.339,76.2
D6: H2.9 HWL2.17 | length 83.3
  Mid-Layer 2 w0.203: H2.9@46.317,43.18 47.523,43.18 63.195,58.852 63.195,59.36 62.687,59.868 62.687,60.376 63.195,60.884 63.195,61.392 62.687,61.9 62.687,62.408 63.195,62.916 63.195,63.424 62.687,63.932 62.687,64.44 63.195,64.948 63.195,65.456 62.687,65.964 62.687,66.472 63.195,66.98 63.195,67.488 62.687,67.996 62.687,68.504 63.195,69.012 63.195,69.52 62.687,70.028 62.687,70.536 63.195,71.044 63.195,71.552 62.687,72.06 62.687,72.568 63.195,73.076 63.195,73.584 62.687,74.092 62.687,74.6 63.195,75.108 63.195,89.844 HWL2.17@81.28,107.929
D8: H1.13 HWL1.15 | length 28
  Mid-Layer 1 w0.203: HWL1.15@12.7,48.26 13.97,49.53 14.478,49.53 14.986,50.038 15.494,50.038 16.002,49.53 18.542,49.53 19.05,50.038 19.558,50.038 20.066,49.53 20.574,49.53 21.082,50.038 21.59,50.038 22.098,49.53 22.606,49.53 23.114,50.038 23.622,50.038 24.13,49.53 24.638,49.53 25.146,50.038 25.654,50.038 26.162,49.53 26.67,49.53 27.178,50.038 27.686,50.038 28.194,49.53 28.702,49.53 29.21,50.038 29.718,50.038 30.226,49.53 31.75,49.53 32.258,50.038 32.766,50.038 33.274,49.53 35.047,49.53 H1.13@36.317,48.26
D9: H1.17 HWL1.13 | length 28
  Mid-Layer 1 w0.203: HWL1.13@12.7,53.34 13.894,54.534 14.402,54.534 14.91,55.042 15.418,55.042 15.926,54.534 18.466,54.534 18.974,55.042 19.482,55.042 19.99,54.534 20.498,54.534 21.006,55.042 21.514,55.042 22.022,54.534 22.53,54.534 23.038,55.042 23.546,55.042 24.054,54.534 24.562,54.534 25.07,55.042 25.578,55.042 26.086,54.534 26.594,54.534 27.102,55.042 27.61,55.042 28.118,54.534 28.626,54.534 29.134,55.042 29.642,55.042 30.15,54.534 31.674,54.534 32.182,55.042 32.69,55.042 33.198,54.534 35.124,54.534 H1.17@36.317,53.34
D11: H2.25 HWL2.10 | length 54.9
  Bottom Layer w0.203: H2.25@46.317,63.5 63.5,80.683 63.5,81.191 64.008,81.699 64.008,82.207 63.5,82.715 63.5,83.223 64.008,83.731 64.008,84.239 63.5,84.747 63.5,85.255 64.008,85.763 64.008,86.271 63.5,86.779 63.5,87.287 64.008,87.795 64.008,88.303 63.5,88.811 63.5,89.319 64.008,89.827 64.008,90.335 63.5,90.843 63.5,91.351 64.008,91.859 64.008,92.367 63.5,92.875 63.5,93.383 64.008,93.891 64.008,94.399 63.5,94.907 63.5,95.415 64.008,95.923 64.008,96.431 63.5,96.939 HWL2.10@63.5,107.95
D12: H1.27 HWL1.9 | length 28.2
  Mid-Layer 1 w0.203: HWL1.9@12.7,63.5 13.97,62.23 14.478,62.23 14.986,62.738 15.494,62.738 16.002,62.23 18.542,62.23 19.05,62.738 19.558,62.738 20.066,62.23 20.574,62.23 21.082,62.738 21.59,62.738 22.098,62.23 23.216,62.23 25.756,64.77 26.264,64.77 26.772,65.278 27.28,65.278 27.788,64.77 28.296,64.77 28.804,65.278 29.312,65.278 29.82,64.77 31.852,64.77 32.36,65.278 32.868,65.278 33.376,64.77 35.047,64.77 H1.27@36.317,66.04
D14: H2.33 HWL2.6 | length 38.9
  Top Layer w0.203: H2.33@46.339,73.66 48.793,76.115 48.793,92.685 53.34,97.231 53.34,97.739 53.848,98.247 53.848,98.755 53.34,99.263 53.34,99.771 53.848,100.279 53.848,100.787 53.34,101.295 53.34,101.803 53.848,102.311 53.848,102.819 53.34,103.327 53.34,103.835 53.848,104.343 53.848,104.851 53.34,105.359 HWL2.6@53.34,107.95
D17: H2.37 HWL2.4 | length 31.7
  Top Layer w0.203: H2.37@46.339,78.74 47.955,80.357 47.955,96.613 47.447,97.121 47.447,97.629 47.955,98.137 47.955,98.645 47.447,99.153 47.447,99.661 47.955,100.169 47.955,100.677 47.447,101.185 47.447,101.693 47.955,102.201 47.955,104.326 48.26,104.631 48.26,105.139 48.768,105.647 48.768,106.155 48.26,106.663 HWL2.4@48.26,107.95
D18: H2.38 HWL2.35 | length 40.4
  Top Layer w0.203: H2.38@41.339,78.74 43.409,80.81 43.409,81.318 43.917,81.826 43.917,82.334 43.409,82.842 43.409,83.35 42.901,83.858 42.901,84.366 43.409,84.874 43.409,86.398 43.917,86.906 43.917,87.414 43.409,87.922 43.409,88.43 43.917,88.938 43.917,89.446 43.409,89.954 43.409,90.462 43.917,90.97 43.917,91.478 43.409,91.986 43.409,92.494 43.917,93.002 43.917,93.51 43.409,94.018 43.409,94.526 43.917,95.034 43.917,95.542 43.409,96.05 43.409,96.558 43.917,97.066 43.917,97.574 43.409,98.082 43.409,106.375 44.45,107.417 44.45,109.14 HWL2.35@48.26,112.95
E6: H1.12 HWL1.23 | length 15.7
  Mid-Layer 1 w0.203: HWL1.23@17.679,45.72 18.695,45.72 19.203,46.228 19.711,46.228 20.219,45.72 20.727,45.72 21.235,46.228 21.743,46.228 22.251,45.72 22.759,45.72 23.267,46.228 23.775,46.228 24.283,45.72 24.791,45.72 25.299,46.228 25.807,46.228 26.315,45.72 26.823,45.72 27.331,46.228 27.839,46.228 28.347,45.72 H1.12@31.317,45.72
E7: H2.15 HWL2.14 | length 71.8
  Top Layer w0.203: H2.15@46.317,50.8 60.579,65.062 60.579,65.57 61.087,66.078 61.087,66.586 60.579,67.094 60.579,67.602 61.087,68.11 61.087,68.618 60.579,69.126 60.579,69.634 61.087,70.142 61.087,70.65 60.579,71.158 60.579,71.666 61.087,72.174 61.087,72.682 60.579,73.19 60.579,73.698 61.087,74.206 61.087,74.714 60.579,75.222 60.579,75.73 61.087,76.238 61.087,76.746 60.579,77.254 60.579,77.762 61.087,78.27 61.087,78.778 60.579,79.286 60.579,79.794 61.087,80.302 61.087,80.81 60.579,81.318 60.579,94.869 HWL2.14@73.66,107.95
E8: H2.16 HWL2.25 | length 101.3
  Mid-Layer 2 w0.203: H2.16@41.317,50.8 40.081,52.036 40.081,52.544 39.573,53.052 39.573,53.56 40.081,54.068 40.081,54.576 39.573,55.084 39.573,55.592 40.081,56.1 40.081,56.608 39.573,57.116 39.573,57.624 40.081,58.132 40.081,58.64 39.573,59.148 39.573,59.656 40.081,60.164 40.081,60.672 39.573,61.18 39.573,61.688 40.081,62.196 40.081,62.704 39.573,63.212 39.573,63.72 40.081,64.228 40.081,64.736 39.573,65.244 39.573,65.752 40.081,66.26 40.081,66.768 39.573,67.276 39.573,67.784 40.081,68.292 40.081,79.527 40.564,80.01 41.872,80.01 42.532,80.67 42.532,92.354 42.024,92.862 42.024,93.37 42.532,93.878 42.532,94.386 42.024,94.894 42.024,95.402 42.532,95.91 42.532,96.418 42.024,96.926 42.024,97.434 42.532,97.942 42.532,99.2 50.013,106.68 51.537,106.68 52.045,106.172 52.553,106.172 53.061,106.68 53.797,106.68 54.61,107.493 54.61,108.509 55.118,109.017 55.118,109.525 54.61,110.033 54.61,110.541 55.118,111.049 55.118,111.557 54.61,112.065 54.61,113.589 55.169,114.148 55.677,114.148 56.185,114.656 56.693,114.656 57.201,114.148 57.709,114.148 58.217,114.656 58.725,114.656 59.233,114.148 59.741,114.148 60.249,114.656 60.757,114.656 61.265,114.148 61.773,114.148 62.281,114.656 62.789,114.656 63.297,114.148 63.805,114.148 64.313,114.656 64.821,114.656 65.329,114.148 65.837,114.148 66.345,114.656 66.853,114.656 67.361,114.148 67.869,114.148 68.377,114.656 68.885,114.656 69.393,114.148 69.901,114.148 70.409,114.656 70.917,114.656 71.425,114.148 72.462,114.148 HWL2.25@73.66,112.95
E11: H1.26 HWL1.29 | length 16.8
  Mid-Layer 1 w0.203: HWL1.29@17.7,60.96 18.716,60.96 19.224,61.468 19.732,61.468 20.24,60.96 20.748,60.96 21.256,61.468 21.764,61.468 22.272,60.96 22.78,60.96 23.288,61.468 23.796,61.468 24.304,60.96 24.812,60.96 25.32,61.468 25.828,61.468 26.336,60.96 26.844,60.96 27.352,61.468 27.86,61.468 28.368,60.96 28.777,60.96 H1.26@31.317,63.5
E12: H2.30 HWL2.31 | length 63
  Bottom Layer w0.203: H2.30@41.317,68.58 40.056,69.842 40.056,70.35 39.548,70.858 39.548,71.366 40.056,71.874 40.056,72.382 39.548,72.89 39.548,73.398 40.056,73.906 40.056,74.27 40.665,74.879 42.189,74.879 42.697,75.387 43.205,75.387 43.713,74.879 44.221,74.879 44.729,75.387 45.237,75.387 45.745,74.879 46.761,74.879 47.269,75.387 47.777,75.387 48.285,74.879 49.225,74.879 54.61,80.264 54.61,80.772 55.118,81.28 55.118,81.788 54.61,82.296 54.61,82.804 55.118,83.312 55.118,83.82 54.61,84.328 54.61,84.836 55.118,85.344 55.118,85.852 54.61,86.36 54.61,86.868 55.118,87.376 55.118,87.884 54.61,88.392 54.61,88.9 55.118,89.408 55.118,89.916 54.61,90.424 54.61,90.932 55.118,91.44 55.118,91.948 54.61,92.456 54.61,92.964 55.118,93.472 55.118,93.98 54.61,94.488 54.61,94.996 55.118,95.504 55.118,96.012 54.61,96.52 54.61,109.14 HWL2.31@58.42,112.95
E13: H2.32 HWL2.32 | length 75.1
  Top Layer w0.203: H2.32@41.317,71.12 37.617,74.82 37.617,75.328 38.125,75.836 38.125,76.344 37.617,76.852 37.617,77.36 38.125,77.868 38.125,78.376 37.617,78.884 37.617,79.392 38.125,79.9 38.125,80.408 37.617,80.916 37.617,81.424 38.125,81.932 38.125,82.44 37.617,82.948 37.617,83.456 38.125,83.964 38.125,84.472 37.617,84.98 37.617,92.092 37.109,92.6 37.109,93.108 37.617,93.616 37.617,94.124 37.109,94.632 37.109,95.14 37.617,95.648 37.617,96.139 36.424,97.333 36.424,97.841 36.932,98.349 36.932,98.857 36.424,99.365 36.424,99.873 36.932,100.381 36.932,100.889 36.424,101.397 36.424,101.905 36.932,102.413 36.932,102.921 36.424,103.429 36.424,103.937 36.932,104.445 36.932,104.953 36.424,105.461 36.424,105.969 35.916,106.477 35.916,106.985 36.424,107.493 36.424,108.001 35.916,108.509 35.916,109.017 36.424,109.525 36.424,110.033 35.916,110.541 35.916,111.049 36.424,111.557 36.424,112.065 35.916,112.573 35.916,113.081 36.424,113.589 36.424,113.944 37.287,114.808 37.795,114.808 38.303,115.316 38.811,115.316 39.319,114.808 39.827,114.808 40.335,115.316 40.843,115.316 41.351,114.808 41.859,114.808 42.367,115.316 42.875,115.316 43.383,114.808 43.891,114.808 44.399,115.316 44.907,115.316 45.415,114.808 45.923,114.808 46.431,115.316 46.939,115.316 47.447,114.808 47.955,114.808 48.463,115.316 48.971,115.316 49.479,114.808 49.987,114.808 50.495,115.316 51.003,115.316 51.511,114.808 52.019,114.808 52.527,115.316 53.035,115.316 53.543,114.808 54.022,114.808 HWL2.32@55.88,112.95
E16: H1.37 HWL1.4 | length 28.2
  Mid-Layer 1 w0.203: HWL1.4@12.7,76.2 13.97,77.47 14.478,77.47 14.986,77.978 15.494,77.978 16.002,77.47 18.542,77.47 19.05,77.978 19.558,77.978 20.066,77.47 20.574,77.47 21.082,77.978 21.59,77.978 22.098,77.47 23.515,77.47 25.979,79.934 26.487,79.934 26.995,80.442 27.503,80.442 28.011,79.934 28.519,79.934 29.027,80.442 29.535,80.442 30.043,79.934 32.075,79.934 32.583,80.442 33.091,80.442 33.599,79.934 35.145,79.934 H1.37@36.339,78.74
E18: H1.38 HWL1.35 | length 16.4
  Mid-Layer 1 w0.203: HWL1.35@17.7,76.2 18.716,76.2 19.224,76.708 19.732,76.708 20.24,76.2 20.748,76.2 21.256,76.708 21.764,76.708 22.272,76.2 23.241,76.2 25.781,78.74 26.289,78.74 26.797,79.248 27.305,79.248 27.813,78.74 28.321,78.74 28.829,79.248 29.337,79.248 29.845,78.74 H1.38@31.339,78.74
F7: H1.11 HWL1.16 | length 28
  Mid-Layer 1 w0.203: HWL1.16@12.679,45.72 13.873,46.914 14.381,46.914 14.889,47.422 15.397,47.422 15.905,46.914 18.445,46.914 18.953,47.422 19.461,47.422 19.969,46.914 20.477,46.914 20.985,47.422 21.493,47.422 22.001,46.914 22.509,46.914 23.017,47.422 23.525,47.422 24.033,46.914 24.541,46.914 25.049,47.422 25.557,47.422 26.065,46.914 26.573,46.914 27.081,47.422 27.589,47.422 28.097,46.914 28.605,46.914 29.113,47.422 29.621,47.422 30.129,46.914 32.161,46.914 32.669,47.422 33.177,47.422 33.685,46.914 35.124,46.914 H1.11@36.317,45.72
F8: H1.16 HWL1.25 | length 15.7
  Mid-Layer 1 w0.203: HWL1.25@17.7,50.8 18.716,50.8 19.224,51.308 19.732,51.308 20.24,50.8 20.748,50.8 21.256,51.308 21.764,51.308 22.272,50.8 22.78,50.8 23.288,51.308 23.796,51.308 24.304,50.8 24.812,50.8 25.32,51.308 25.828,51.308 26.336,50.8 26.844,50.8 27.352,51.308 27.86,51.308 28.368,50.8 H1.16@31.317,50.8
F9: H2.20 HWL2.27 | length 81.9
  Mid-Layer 2 w0.203: H2.20@41.317,55.88 42.951,57.514 42.951,58.53 42.443,59.038 42.443,59.546 42.951,60.054 42.951,61.07 42.443,61.578 42.443,62.086 42.951,62.594 42.951,63.61 42.443,64.118 42.443,64.626 42.951,65.134 42.951,66.15 42.443,66.658 42.443,67.166 42.951,67.674 42.951,68.69 42.443,69.198 42.443,69.706 42.951,70.214 42.951,71.23 42.443,71.738 42.443,72.246 42.951,72.754 42.951,73.77 42.443,74.278 42.443,74.786 42.951,75.294 42.951,76.31 42.443,76.818 42.443,77.326 42.951,77.834 42.951,97.968 50.851,105.867 51.359,105.867 51.867,105.359 52.375,105.359 52.883,105.867 53.391,105.867 53.899,105.359 54.407,105.359 54.915,105.867 55.423,105.867 55.931,106.375 56.439,106.375 56.947,105.867 57.455,105.867 57.963,106.375 58.471,106.375 58.979,105.867 59.487,105.867 59.995,106.375 60.503,106.375 61.011,105.867 61.417,105.867 62.23,106.68 62.23,109.118 63.043,109.931 63.551,109.931 64.059,110.439 64.567,110.439 65.075,109.931 65.561,109.931 HWL2.27@68.58,112.95
F10: H1.22 HWL1.28 | length 15.7
  Mid-Layer 1 w0.203: HWL1.28@17.7,58.42 18.716,58.42 19.224,58.928 19.732,58.928 20.24,58.42 20.748,58.42 21.256,58.928 21.764,58.928 22.272,58.42 22.78,58.42 23.288,58.928 23.796,58.928 24.304,58.42 24.812,58.42 25.32,58.928 25.828,58.928 26.336,58.42 26.844,58.42 27.352,58.928 27.86,58.928 28.368,58.42 H1.22@31.317,58.42
F11: H1.25 HWL1.10 | length 28.6
  Bottom Layer w0.203: HWL1.10@12.7,60.96 13.894,59.766 14.402,59.766 14.91,60.274 15.418,60.274 15.926,59.766 18.466,59.766 18.974,60.274 19.482,60.274 19.99,59.766 20.498,59.766 21.006,60.274 21.514,60.274 22.022,59.766 22.53,59.766 23.038,60.274 23.546,60.274 24.054,59.766 24.562,59.766 25.07,60.274 25.578,60.274 26.086,59.766 26.594,59.766 27.102,60.274 27.61,60.274 28.118,59.766 28.626,59.766 29.134,60.274 29.642,60.274 30.15,59.766 32.584,59.766 H1.25@36.317,63.5
F12: H2.29 HWL2.8 | length 47.7
  Bottom Layer w0.203: H2.29@46.317,68.58 58.42,80.683 58.42,81.191 58.928,81.699 58.928,82.207 58.42,82.715 58.42,83.223 58.928,83.731 58.928,84.239 58.42,84.747 58.42,85.255 58.928,85.763 58.928,86.271 58.42,86.779 58.42,87.287 58.928,87.795 58.928,88.303 58.42,88.811 58.42,89.319 58.928,89.827 58.928,90.335 58.42,90.843 58.42,91.351 58.928,91.859 58.928,92.367 58.42,92.875 58.42,93.383 58.928,93.891 58.928,94.399 58.42,94.907 58.42,95.415 58.928,95.923 58.928,96.431 58.42,96.939 HWL2.8@58.42,107.95
F13: H2.31 HWL2.7 | length 42.1
  Top Layer w0.203: H2.31@46.317,71.12 49.301,74.104 49.301,92.595 55.88,99.173 55.88,99.681 56.388,100.189 56.388,100.697 55.88,101.205 55.88,101.713 56.388,102.221 56.388,102.729 55.88,103.237 55.88,103.745 56.388,104.253 56.388,104.761 55.88,105.269 HWL2.7@55.88,107.95
F14: H1.41 HWL1.2 | length 28.3
  Mid-Layer 1 w0.203: HWL1.2@12.7,81.28 13.97,82.55 14.478,82.55 14.986,83.058 15.494,83.058 16.002,82.55 18.542,82.55 19.05,83.058 19.558,83.058 20.066,82.55 20.574,82.55 21.082,83.058 21.59,83.058 22.098,82.55 23.73,82.55 26.27,85.09 26.778,85.09 27.286,85.598 27.794,85.598 28.302,85.09 28.81,85.09 29.318,85.598 29.826,85.598 30.334,85.09 31.858,85.09 32.366,85.598 32.874,85.598 33.382,85.09 35.069,85.09 H1.41@36.339,83.82
F15: H1.39 HWL1.3 | length 28.2
  Mid-Layer 1 w0.203: HWL1.3@12.7,78.74 13.97,80.01 14.478,80.01 14.986,80.518 15.494,80.518 16.002,80.01 18.542,80.01 19.05,80.518 19.558,80.518 20.066,80.01 20.574,80.01 21.082,80.518 21.59,80.518 22.098,80.01 23.241,80.01 25.705,82.474 26.213,82.474 26.721,82.982 27.229,82.982 27.737,82.474 28.245,82.474 28.753,82.982 29.261,82.982 29.769,82.474 31.801,82.474 32.309,82.982 32.817,82.982 33.325,82.474 35.145,82.474 H1.39@36.339,81.28
F16: H1.40 HWL1.36 | length 16.4
  Mid-Layer 1 w0.203: HWL1.36@17.7,78.74 18.716,78.74 19.224,79.248 19.732,79.248 20.24,78.74 20.748,78.74 21.256,79.248 21.764,79.248 22.272,78.74 23.241,78.74 25.781,81.28 26.289,81.28 26.797,81.788 27.305,81.788 27.813,81.28 28.321,81.28 28.829,81.788 29.337,81.788 29.845,81.28 H1.40@31.339,81.28
F17: H2.39 HWL2.3 | length 31.1
  Top Layer w0.203: HWL2.3@45.72,107.95 44.738,106.968 44.738,99.136 45.246,98.628 45.246,98.12 44.738,97.612 44.738,97.104 45.246,96.596 45.246,96.088 44.738,95.58 44.738,95.072 45.246,94.564 45.246,94.056 44.738,93.548 44.738,93.04 45.246,92.532 45.246,92.024 44.738,91.516 44.738,91.008 45.246,90.5 45.246,89.992 44.738,89.484 44.738,88.976 44.23,88.468 44.23,87.96 44.738,87.452 44.738,86.944 44.23,86.436 44.23,85.928 44.738,85.42 44.738,84.912 44.23,84.404 44.23,83.896 44.738,83.388 44.738,82.88 H2.39@46.339,81.28
F18: H2.40 HWL2.36 | length 38.6
  Mid-Layer 2 w0.203: H2.40@41.339,81.28 39.7,82.918 39.7,83.426 39.192,83.934 39.192,84.442 39.7,84.95 39.7,85.458 39.192,85.966 39.192,86.474 39.7,86.982 39.7,87.49 40.208,87.998 40.208,88.506 39.7,89.014 39.7,89.522 40.208,90.03 40.208,90.538 39.7,91.046 39.7,91.554 40.208,92.062 40.208,92.57 39.7,93.078 39.7,93.586 40.208,94.094 40.208,94.602 39.7,95.11 39.7,95.618 40.208,96.126 40.208,96.634 39.7,97.142 39.7,97.65 40.208,98.158 40.208,98.666 39.7,99.174 39.7,102.083 44.399,106.782 44.399,108.814 44.907,109.322 44.907,109.83 44.399,110.338 44.399,111.629 HWL2.36@45.72,112.95
G8: H1.15 HWL1.14 | length 28
  Mid-Layer 1 w0.203: HWL1.14@12.7,50.8 13.894,51.994 14.402,51.994 14.91,52.502 15.418,52.502 15.926,51.994 18.466,51.994 18.974,52.502 19.482,52.502 19.99,51.994 20.498,51.994 21.006,52.502 21.514,52.502 22.022,51.994 22.53,51.994 23.038,52.502 23.546,52.502 24.054,51.994 24.562,51.994 25.07,52.502 25.578,52.502 26.086,51.994 26.594,51.994 27.102,52.502 27.61,52.502 28.118,51.994 28.626,51.994 29.134,52.502 29.642,52.502 30.15,51.994 31.674,51.994 32.182,52.502 32.69,52.502 33.198,51.994 35.124,51.994 H1.15@36.317,50.8
G9: H2.19 HWL2.12 | length 65.8
  Top Layer w0.203: H2.19@46.317,55.88 48.26,55.88 51.841,59.461 51.841,59.969 52.349,60.477 52.349,60.985 51.841,61.493 51.841,62.001 52.349,62.509 52.349,63.017 51.841,63.525 51.841,64.033 52.349,64.541 52.349,65.049 51.841,65.557 51.841,66.065 52.349,66.573 52.349,67.081 51.841,67.589 51.841,68.097 52.349,68.605 52.349,69.113 51.841,69.621 51.841,70.129 52.349,70.637 52.349,71.145 51.841,71.653 51.841,72.161 52.349,72.669 52.349,73.177 51.841,73.685 51.841,74.193 52.349,74.701 52.349,75.209 51.841,75.717 51.841,88.214 68.58,104.953 HWL2.12@68.58,107.95
G11: H1.21 HWL1.11 | length 28
  Mid-Layer 1 w0.203: HWL1.11@12.7,58.42 13.894,59.614 14.402,59.614 14.91,60.122 15.418,60.122 15.926,59.614 18.466,59.614 18.974,60.122 19.482,60.122 19.99,59.614 20.498,59.614 21.006,60.122 21.514,60.122 22.022,59.614 22.53,59.614 23.038,60.122 23.546,60.122 24.054,59.614 24.562,59.614 25.07,60.122 25.578,60.122 26.086,59.614 26.594,59.614 27.102,60.122 27.61,60.122 28.118,59.614 28.626,59.614 29.134,60.122 29.642,60.122 30.15,59.614 31.674,59.614 32.182,60.122 32.69,60.122 33.198,59.614 35.124,59.614 H1.21@36.317,58.42
G13: H1.46 HWL1.39 | length 16.4
  Mid-Layer 1 w0.203: HWL1.39@17.7,86.36 20.24,88.9 20.748,88.9 21.256,89.408 21.764,89.408 22.272,88.9 22.78,88.9 23.288,89.408 23.796,89.408 24.304,88.9 24.812,88.9 25.32,89.408 25.828,89.408 26.336,88.9 26.844,88.9 27.352,89.408 27.86,89.408 28.368,88.9 H1.46@31.339,88.9
G14: H1.42 HWL1.37 | length 16.4
  Mid-Layer 1 w0.203: HWL1.37@17.7,81.28 18.716,81.28 19.224,81.788 19.732,81.788 20.24,81.28 20.748,81.28 21.256,81.788 21.764,81.788 22.272,81.28 23.241,81.28 25.781,83.82 26.289,83.82 26.797,84.328 27.305,84.328 27.813,83.82 28.321,83.82 28.829,84.328 29.337,84.328 29.845,83.82 H1.42@31.339,83.82
G16: H2.41 HWL2.2 | length 30.1
  Bottom Layer w0.203: HWL2.2@43.18,107.95 47.955,103.175 47.955,101.693 48.463,101.185 48.463,100.677 47.955,100.169 47.955,99.661 48.463,99.153 48.463,98.645 47.955,98.137 47.955,97.629 48.463,97.121 48.463,96.613 47.955,96.105 47.955,95.597 48.463,95.089 48.463,94.581 47.955,94.073 47.955,93.565 48.463,93.057 48.463,92.549 47.955,92.041 47.955,91.533 48.463,91.025 48.463,90.517 47.955,90.009 47.955,89.501 48.463,88.993 48.463,88.485 47.955,87.977 47.955,87.469 48.463,86.961 48.463,86.453 47.955,85.945 47.955,85.437 H2.41@46.339,83.82
G18: H2.42 HWL2.37 | length 34.5
  Top Layer w0.203: H2.42@41.339,83.82 42.951,85.433 42.951,88.989 42.443,89.497 42.443,90.005 42.951,90.513 42.951,91.529 42.443,92.037 42.443,92.545 42.951,93.053 42.951,93.561 42.443,94.069 42.443,94.577 42.951,95.085 42.951,95.593 42.443,96.101 42.443,96.609 42.951,97.117 42.951,97.625 42.443,98.133 42.443,98.641 42.951,99.149 42.951,99.657 42.443,100.165 42.443,100.673 42.951,101.181 42.951,101.689 42.443,102.197 42.443,102.705 42.951,103.213 42.951,103.721 42.443,104.229 42.443,104.737 42.951,105.245 42.951,106.35 41.91,107.391 41.91,108.407 42.418,108.915 42.418,109.423 41.91,109.931 41.91,111.68 HWL2.37@43.18,112.95